# Altium PCB BOARD.PcbDoc
Units mm, origin at the board's own origin, x right, y up, seen from the top; angles counter-clockwise.
Board outline 18 x 32.5 mm, 2 copper layers (Top Layer, Bottom Layer), stack 0.46 mm thick; 78 components, 43 nets, 200 pads, 0 vias.
Unrouted connection lines stored in the file: 152.
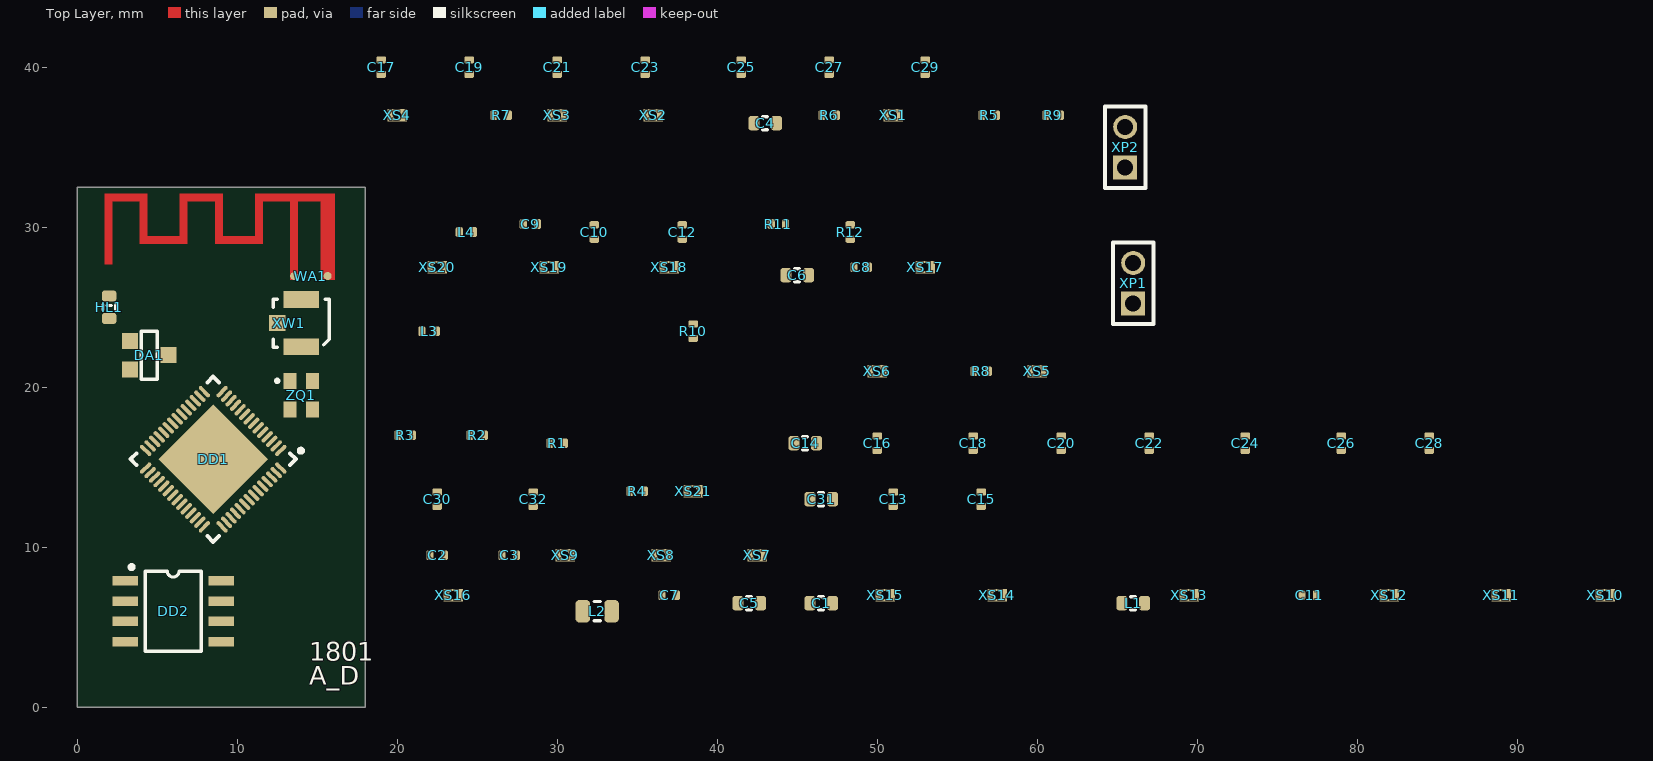
[diagram p0: Top Layer view]
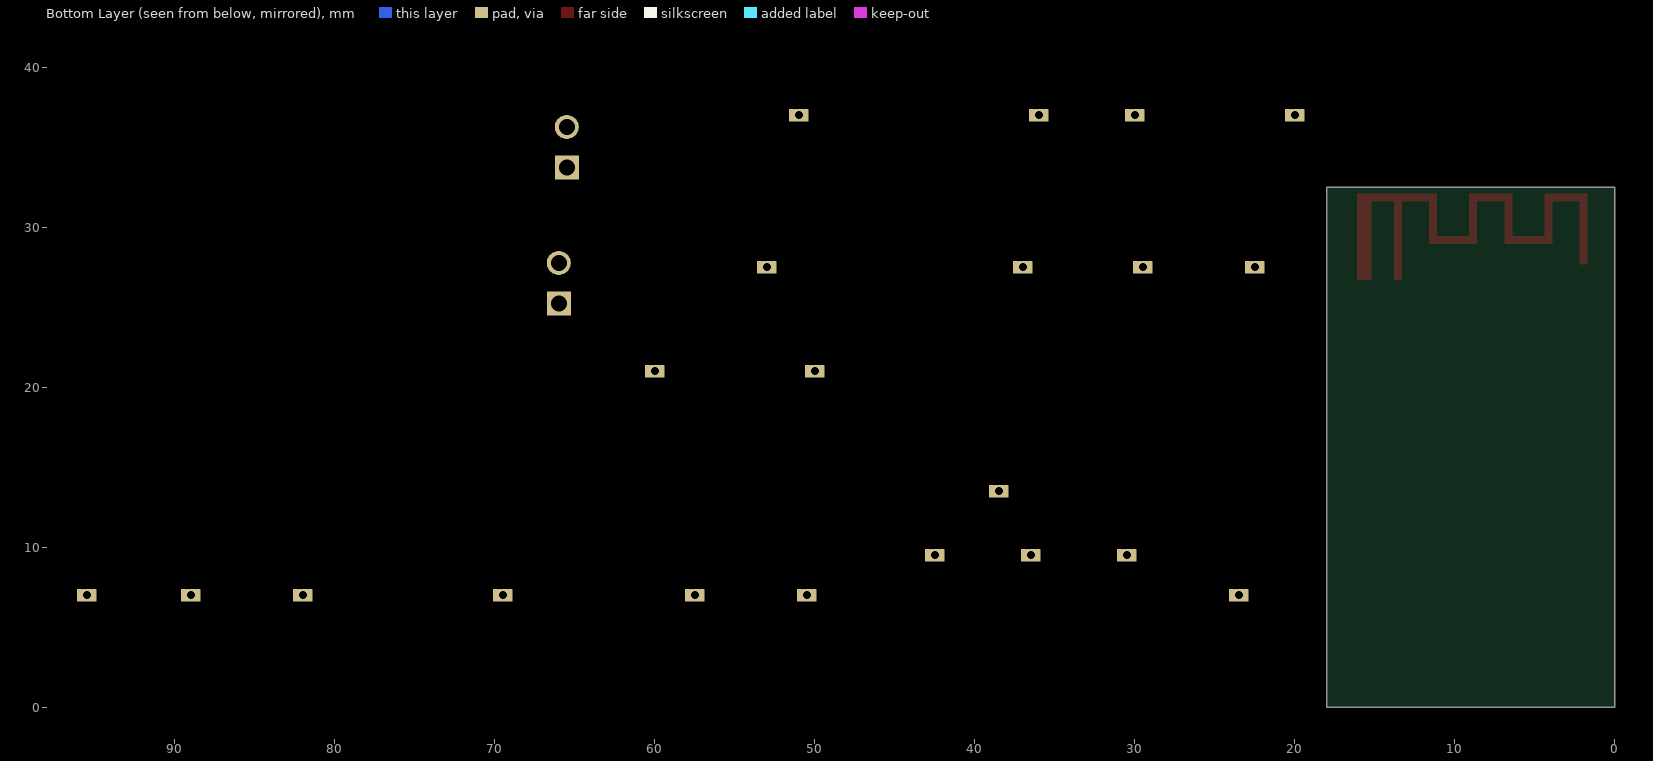
[diagram p1: Bottom Layer view, seen from below]

## Layer stack, top to bottom
Top Solder: solder mask 0.01, Solder Resist, Dk 3.5
Top Layer: signal copper 0.03
Dielectric1: core 0.4, FR-4, Dk 4.2
Bottom Layer: signal copper 0.03
Bottom Solder: solder mask 0.01, Solder Resist, Dk 3.5

## Board outline
0,0 18,0 18,32.5 0,32.5

## Design rules (kind name [scope] priority, off if disabled: settings)
Clearance Clearance_ANT [InNetClass('ANT_Class') vs InPolygon] p1: gap=0.6 ignorepadtopadclearanceinfootprint=FALSE except(0: Arc-Hole Track-Hole SMDPad-Hole THPad-Hole Via-Hole Fill-Hole Poly-Hole Region-Hole Text-Hole)
Clearance Clearance_GND_Poly [(InNet('GND') AND InPolygon )] p2: gap=0.2 ignorepadtopadclearanceinfootprint=FALSE except(0: Arc-Hole Track-Hole SMDPad-Hole THPad-Hole Via-Hole Fill-Hole Poly-Hole Region-Hole Text-Hole)
Clearance [All] p3: gap=0.15 ignorepadtopadclearanceinfootprint=FALSE except(0: Arc-Hole Track-Hole SMDPad-Hole THPad-Hole Via-Hole Fill-Hole Poly-Hole Region-Hole Text-Hole)
ComponentClearance [All] p1 off: gap=0.25 collisioncheckmode=3 verticalgap=0.25 showdistances=FALSE
DiffPairsRouting [All] p1: maxlimit=0.4 minlimit=0.15 mostfreqgap=0.25 toplayer_minwidth=0.2 toplayer_maxwidth=0.4 toplayer_prefwidth=0.25 bottomlayer_minwidth=0.2 bottomlayer_maxwidth=0.4 bottomlayer_prefwidth=0.25 maxuncoupledlength=12
Height [All] p1: minheight=0 maxheight=25 prefheight=25
HoleSize [All] p1: absolutevalues=TRUE maxlimit=6 minlimit=0.3 maxpercent=80.000 minpercent=20.000
HoleToHoleClearance [All] p1: gap=0.25 allowstackedmicrovias=TRUE
MinimumSolderMaskSliver [All] p1 off: minsoldermaskwidth=0.254
PlaneClearance [All] p1: clearance=0.5
PlaneConnect [All] p1: planeconnectstyle=Relief reliefexpansion=0.5 reliefentries=4 reliefconductorwidth=0.25 reliefairgap=0.25
PolygonConnect PolygonConnect_XW1 [InComponent('XW1') vs IsPolygon] p1: connectstyle=Direct reliefconductorwidth=0.254 reliefentries=4 polygonreliefangle="90 Angle" airgapwidth=0.254
PolygonConnect PolygonConnect_Components [InComponent('C*') OR InComponent('R*') OR InComponent('NR*') OR InComponent('DA*') OR InComponent('DD*') OR InComponent('HL*')] p2: connectstyle=Relief reliefconductorwidth=0.2 reliefentries=4 polygonreliefangle="90 Angle" airgapwidth=0.25
PolygonConnect PolygonConnect_Connectors [All vs (InPadClass('All Pads'))] p3: connectstyle=Relief reliefconductorwidth=0.6 reliefentries=4 polygonreliefangle="90 Angle" airgapwidth=0.3
PolygonConnect PolygonConnect_Via [All] p4: connectstyle=Direct reliefconductorwidth=0.254 reliefentries=4 polygonreliefangle="90 Angle" airgapwidth=0.254
RoutingCorners [All] p1: cornerstyle=45-Degree minsetback=1.5 maxsetback=3.5
RoutingVias [All] p1: holewidth=0.6 width=1.2 viastyle="Through Hole" minholewidth=0.3 minwidth=0.6 maxholewidth=1 maxwidth=2
SMDEntry [All] p1: side=TRUE corner=TRUE anyangle=TRUE
SilkToSilkClearance [All] p1 off: silktosilkclearance=0.254
SilkToSolderMaskClearance [IsPad] p1 off: minsilkscreentomaskgap=0.254 clearancetoexposedcopper=TRUE
SolderMaskExpansion [All] p1: expansion=0.1
Width [All] p1: maxlimit=8 minlimit=0.2 preferedwidth=0.6
Width Width_TrackEnds [All] p2 off: maxlimit=0.25 minlimit=0.25 preferedwidth=0.25 checkconnectedcopper=TRUE
19 further rules are at their usual default settings.

## Components (designator, comment, footprint, x,y, rotation, side; value= is the part's Value field where it differs from the comment)
C1 "Capacitor" C0603_L 46.499,6.499 r0 top value=10uF
C2 "Capacitor" C0402_L 22.499,9.499 r0 top value=12pF
C3 "Capacitor" C0402_L 26.999,9.499 r0 top value=12pF
C4 "Capacitor" C0603_L 42.999,36.499 r0 top value=10uF
C5 "Capacitor" C0603_L 41.999,6.499 r0 top value=10uF
C6 "Capacitor" C0603_L 45,27 r0 top value=10uF
C7 "Capacitor" C0402_L 36.999,6.999 r0 top value=0.1uF
C8 "Capacitor" C0402_L 49,27.5 r0 top value=0.1uF
C9 "Capacitor" C0402_L 28.325,30.2 r0 top value=2.7pF
C10 "Capacitor" C0402_L 32.325,29.7 r90 top value=2.7pF
C11 "Capacitor" C0402_L 76.999,6.999 r0 top value=0.1uF
C12 "Capacitor" C0402_L 37.825,29.7 r90 top value=2.7pF
C13 "Capacitor" C0402_L 50.999,12.999 r90 top value=0.1uF
C14 "Capacitor" C0603_L 45.499,16.499 r0 top value=10uF
C15 "Capacitor" C0402_L 56.499,12.999 r90 top value=0.1uF
C16 "Capacitor" C0402_L 49.999,16.499 r90 top value=0.1uF
C17 "Capacitor" C0402_L 18.999,39.999 r90 top value=1uF
C18 "Capacitor" C0402_L 55.999,16.499 r90 top value=0.1uF
C19 "Capacitor" C0402_L 24.499,39.999 r90 top value=0.1uF
C20 "Capacitor" C0402_L 61.499,16.499 r90 top value=1uF
C21 "Capacitor" C0402_L 29.999,39.999 r90 top value=0.1uF
C22 "Capacitor" C0402_L 66.999,16.499 r90 top value=0.1uF
C23 "Capacitor" C0402_L 35.499,39.999 r90 top value=0.1uF
C24 "Capacitor" C0402_L 72.999,16.499 r90 top value=0.1uF
C25 "Capacitor" C0402_L 41.499,39.999 r90 top value=0.1uF
C26 "Capacitor" C0402_L 78.999,16.499 r90 top value=0.1uF
C27 "Capacitor" C0402_L 46.999,39.999 r90 top value=0.1uF
C28 "Capacitor" C0402_L 84.499,16.499 r90 top value=0.1uF
C29 "Capacitor" C0402_L 52.999,39.999 r90 top value=0.1uF
C30 "Capacitor" C0402_L 22.499,12.999 r90 top value=0.1uF
C31 "Capacitor" C0603_L 46.499,12.999 r0 top value=10uF
C32 "Capacitor" C0402_L 28.499,12.999 r90 top value=0.1uF
DA1 "MAX809-Series" SOT-23 4.5,22 r270 top value=MAX809SEUR
DD1 "RTL8711AM" QFN-56-7x7 8.5,15.5 r225 top
DD2 "MX25L1606E-8Pin-Series" SOIC-8 6,6 r270 top value=MX25L1606EM1I-12
HL1 "Text" LD0603_L 2,25 r90 top value=BL-LS0603GC
L1 "FerriteBead" L0603_L 65.999,6.499 r0 top value=BLM18PG121SN1
L2 "FerriteBead" L0805_L 32.499,5.999 r0 top value=BLM21PG331SN1
L3 "Coil" L0402_L 21.998,23.499 r0 top value=LQG15HS2N2S02D
L4 "Coil" L0402_L 24.325,29.7 r0 top value=LQG15HS2N2S02D
R1 "Resistor" R0402_L 29.999,16.499 r0 top value=470
R2 "Resistor" R0402_L 24.999,16.999 r0 top value=100k
R3 "Resistor" R0402_L 20.499,16.999 r0 top value=10k
R4 "Resistor" R0402_L 34.999,13.499 r0 top value=100k
R5 "Resistor" R0402_L 56.999,36.999 r0 top value=10k
R6 "Resistor" R0402_L 46.999,36.999 r0 top value=51k
R7 "Resistor" R0402_L 26.499,36.999 r0 top value=51k
R8 "Resistor" R0402_L 56.499,20.999 r0 top value=51k
R9 "Resistor" R0402_L 60.999,36.999 r0 top value=0
R10 "Resistor" R0402_L 38.498,23.499 r90 top value=0
R11 "Resistor" R0402_L 43.825,30.2 r0 top value=0
R12 "Resistor" R0402_L 48.325,29.7 r90 top value=0
WA1 "Antenna_PCB_2p" PCB-AN043 9,29.5 r180 top net-tie value=PCB-AN043
XP1 "SWD" PLS-2 66,26.5 r90 top value=PLS-2
XP2 "LOG" PLS-2 65.499,34.999 r90 top value=PLS-2
XS1 "PCB-SPIN" PCB-SPIN 50.999,36.999 r90 top
XS2 "PCB-SPIN" PCB-SPIN 35.999,36.999 r90 top
XS3 "PCB-SPIN" PCB-SPIN 29.999,36.999 r90 top
XS4 "PCB-SPIN" PCB-SPIN 19.999,36.999 r90 top
XS5 "PCB-SPIN" PCB-SPIN 59.999,20.999 r90 top
XS6 "PCB-SPIN" PCB-SPIN 49.999,20.999 r90 top
XS7 "PCB-SPIN" PCB-SPIN 42.499,9.499 r90 top
XS8 "PCB-SPIN" PCB-SPIN 36.499,9.499 r90 top
XS9 "PCB-SPIN" PCB-SPIN 30.499,9.499 r90 top
XS10 "PCB-SPIN" PCB-SPIN 95.499,6.999 r90 top
XS11 "PCB-SPIN" PCB-SPIN 88.999,6.999 r90 top
XS12 "PCB-SPIN" PCB-SPIN 81.999,6.999 r90 top
XS13 "PCB-SPIN" PCB-SPIN 69.499,6.999 r90 top
XS14 "PCB-SPIN" PCB-SPIN 57.499,6.999 r90 top
XS15 "PCB-SPIN" PCB-SPIN 50.499,6.999 r90 top
XS16 "PCB-SPIN" PCB-SPIN 23.499,6.999 r90 top
XS17 "PCB-SPIN" PCB-SPIN 53,27.5 r90 top
XS18 "PCB-SPIN" PCB-SPIN 37,27.5 r90 top
XS19 "PCB-SPIN" PCB-SPIN 29.5,27.5 r90 top
XS20 "PCB-SPIN" PCB-SPIN 22.5,27.5 r90 top
XS21 "PCB-SPIN" PCB-SPIN 38.499,13.499 r90 top
XW1 "Con-RF-M" 1909763-1 14,24 r270 top value=1909763-1
ZQ1 "Crystal" SX-2520 14,19.5 r270 top value=CX2520DB40000D0FLJCC

## Footprints (in the part's own frame and the unit in brackets; to place one, negate y for a bottom-side part, rotate by r counter-clockwise, add the part's x,y. Pads: shape width x height; smd on the part's side, far side on the other; paste and mask are expansions set on the pad)
1909763-1 [mm] "IPX"
  rect 1x1.05 smd: 1(0,-1.5)
  rect 1.05x2.2 smd: 2(-1.475,0) 2(1.475,0)
  silkscreen extent -1.5,-1.75 1.5,1.75, body extent -1.5,-1.55 1.5,1.55, height 1.2
C0402_L [mm] "Chip Capacitor; Body 1.0 x 0.5 mm (LxW typ)"
  rrect50% 0.45x0.6 smd: 1(-0.452,0) 2(0.452,0)
  body extent -0.5,-0.25 0.5,0.25, height 0.61
C0603_L [mm] "Chip Capacitor; Body 1.6 x 0.8 mm (LxW typ)"
  rrect50% 0.7x0.9 smd: 1(-0.7,0) 2(0.7,0)
  silkscreen extent -0.15,-0.41 0.15,0.41, body extent -0.79,-0.41 0.81,0.39, height 0.8
L0402_L [mm] "Chip Coil; Body 1.0 x 0.5 mm (LxW typ)"
  rrect50% 0.45x0.6 smd mask+0.05: 1(-0.452,0) 2(0.452,0)
  Top Layer pour cut-out: -0.325,0.3 0.325,0.3 0.325,-0.3 -0.325,-0.3
  body extent -0.5,-0.3 0.5,0.3, height 0.5
L0603_L [mm] "Chip Coil; Body 1.6 x 0.8 mm (LxW typ)"
  rrect50% 0.7x0.9 smd: 1(-0.7,0) 2(0.7,0)
  silkscreen extent -0.15,-0.41 0.15,0.41, body extent -0.8,-0.47 0.8,0.48, height 0.8
L0805_L [mm] "Chip Coil; Body 2.0 x 1.2 mm (LxW typ)"
  rrect50% 0.9x1.4 smd: 1(-0.9,0) 2(0.9,0)
  silkscreen extent -0.2,-0.6 0.2,0.6, body extent -0.97,-0.65 1.03,0.65, height 1.2
LD0603_L [mm] "Chip Led; Body 1.6 x 0.8 mm (LxW typ)"
  rrect50% 0.7x0.9 smd mask+0.05: 1(-0.7,0) 2(0.7,0)
  silkscreen extent -0.15,-0.41 0.15,0.41, body extent -0.8,-0.4 0.8,0.4, height 0.7
PCB-AN043 [mm]
  round 0.5 smd: 1(-4.55,2.55) 2(-6.65,2.55)
  Top Layer region: -7.1,-2.1 -6.2,-2.1 -6.2,2.8 -7.1,2.8
  Top Layer region: -7.1,-2.6 -2.1,-2.6 -2.1,-2.1 -7.1,-2.1
  Top Layer region: -4.8,2.8 -4.8,-2.1 -4.3,-2.1 -4.3,2.8
  Top Layer region: -2.6,0.54 -2.6,-2.1 -2.1,-2.1 -2.1,0.54
  Top Layer region: -0.1,0.54 -2.1,0.54 -2.1,0.04 -0.1,0.04
  Top Layer region: -0.1,0.54 -0.1,-2.1 0.4,-2.1 0.4,0.54
  Top Layer region: 2.6,-2.1 -0.1,-2.1 -0.1,-2.6 2.6,-2.6
  Top Layer region: 2.1,0.54 2.1,-2.1 2.6,-2.1 2.6,0.54
  Top Layer region: 4.6,0.54 2.6,0.54 2.6,0.04 4.6,0.04
  Top Layer region: 4.6,0.54 4.6,-2.1 5.1,-2.1 5.1,0.54
  Top Layer region: 7.3,-2.1 4.6,-2.1 4.6,-2.6 7.3,-2.6
  Top Layer region: 6.8,1.84 6.8,-2.1 7.3,-2.1 7.3,1.84
  Multi-Layer pour cut-out: -7.6,2.3 -7.6,-2.9 7.6,-2.9 7.6,2.3
PCB-SPIN [mm]
  rect 0.8x1.2 hole 0.5: 1(0,0)
PLS-2 [mm]
  rect 1.5x1.5 hole 1: 1(-1.27,0)
  round 1.5 hole 1: 2(1.27,0)
  silkscreen extent -2.54,-1.27 2.54,1.27, body extent -2.54,-1.27 2.54,1.27, height 8.9
QFN-56-7x7 [mm] "QFN, 56-Leads, Body 7,00x7,00mm, Pitch 0,40mm, Thermal Pad 4,85x4,85mm, IPC Medium Density"
  oval 0.9x0.25 smd: 1(-3.375,2.6) 2(-3.375,2.2) 3(-3.375,1.8) 4(-3.375,1.4) 5(-3.375,1) 6(-3.375,0.6) 7(-3.375,0.2) 8(-3.375,-0.2) 9(-3.375,-0.6) 10(-3.375,-1) 11(-3.375,-1.4) 12(-3.375,-1.8) 13(-3.375,-2.2) 14(-3.375,-2.6) 29(3.375,-2.6) 30(3.375,-2.2) 31(3.375,-1.8) 32(3.375,-1.4) 33(3.375,-1) 34(3.375,-0.6) 35(3.375,-0.2) 36(3.375,0.2) 37(3.375,0.6) 38(3.375,1) 39(3.375,1.4) 40(3.375,1.8) 41(3.375,2.2) 42(3.375,2.6)
  oval 0.25x0.9 smd: 15(-2.6,-3.375) 16(-2.2,-3.375) 17(-1.8,-3.375) 18(-1.4,-3.375) 19(-1,-3.375) 20(-0.6,-3.375) 21(-0.2,-3.375) 22(0.2,-3.375) 23(0.6,-3.375) 24(1,-3.375) 25(1.4,-3.375) 26(1.8,-3.375) 27(2.2,-3.375) 28(2.6,-3.375) 43(2.6,3.375) 44(2.2,3.375) 45(1.8,3.375) 46(1.4,3.375) 47(1,3.375) 48(0.6,3.375) 49(0.2,3.375) 50(-0.2,3.375) 51(-0.6,3.375) 52(-1,3.375) 53(-1.4,3.375) 54(-1.8,3.375) 55(-2.2,3.375) 56(-2.6,3.375)
  rect 4.85x4.85 smd: 57(0,0)
  silkscreen extent -4.37,-3.65 3.65,3.65, body extent -3.55,-3.55 3.55,3.55, height 0.9
R0402_L [mm] "Chip Resistor; Body 1.0 x 0.5 mm (LxW typ)"
  rrect50% 0.45x0.6 smd: 1(-0.452,0) 2(0.452,0)
  body extent -0.5,-0.25 0.5,0.25, height 0.4
SOIC-8 [mm] "4320.8-А Small Outline; 8 Leads; Body Width 3.9 mm; Pitch 1.27 mm"
  rect 0.6x1.6 smd: 1(-1.905,-3) 2(-0.635,-3) 3(0.635,-3) 4(1.905,-3) 5(1.905,3) 6(0.635,3) 7(-0.635,3) 8(-1.905,3)
  silkscreen extent -2.88,-2.72 2.5,1.75, body extent -2.5,-3.01 2.5,3.01, height 1.75
SOT-23 [mm] "КТ-46"
  rect 1x1 smd: 1(-0.9,-1.2) 2(0,1.2) 3(0.9,-1.2)
  silkscreen extent -1.5,-0.5 1.5,0.5, body extent -1.5,-1.15 1.5,1.15, height 1.11
SX-2520 [mm]
  rect 1x0.8 smd: 1(-0.9,-0.7) 2(0.9,-0.7) 3(0.9,0.7) 4(-0.9,0.7)
  silkscreen extent -1,-1.6 -0.8,-1.4, body extent -1.25,-1 1.25,1, height 0.55

## Part data
C1 C4 C5 C6 C14 C31: library part GRM188R60J106ME47D, Dielectric Type=X5R, Manufacturer=Murata, Tolerance=±20%, Voltage=6.3V, Working Temperature Max=+85°С, Working Temperature Min=-55°С, Application Category=1, ID=136, Part Number=GRM188R60J106ME47D, Published=18.05.2010, Publisher="Andrew Danich", Type=Конденсатор
C2 C3: library part GRM1555C1H120JA01D, Dielectric Type=NP0, Manufacturer=Murata, Tolerance=±5%, Voltage=50V, ID=159, Part Number=GRM1555C1H120JA01D, Published=18.05.2010, Publisher="Andrew Danich", Type=Конденсатор
C7 C8 C11 C13 C15 C16 C18 C19 C21 C22 C23 C24 C25 C26 C27 C28 C29 C30 C32: library part GRM155R71A104KA01D, Dielectric Type=X7R, Manufacturer=Murata, Tolerance=±10%, Voltage=10V, ID=151, Part Number=GRM155R71A104KA01D, Published=18.05.2010, Publisher="Andrew Danich", Type=Конденсатор
C9 C10 C12: library part GRM1555C1E2R7BA01D, Dielectric Type=NP0, Manufacturer=Murata, Tolerance=±0.1pF, Voltage=50V, Working Temperature Max=+125°С, Working Temperature Min=-55°С, Application Category=1, ID=198, Part Number=GRM1555C1E2R7BA01D, Published=18.05.2010, Publisher="Andrew Danich", Type=Конденсатор
C17 C20: library part GRM155R61A105KE15D, Dielectric Type=X5R, Manufacturer=Murata, Tolerance=±10%, Voltage=10V, Working Temperature Max=+125°С, Working Temperature Min=-55°С, Application Category=1, ID=179, Part Number=GRM155R61A105KE15D, Published=18.05.2010, Publisher="Andrew Danich", Type=Конденсатор
DA1: library part MAX809SEUR, Manufacturer="Maxim Integrated", Supply Current=17uA, Supply Voltage=+1.2…5.5V, Temperature Coefficient=30ppm, Working Temperature Max=+105°С, Working Temperature Min=-40°С, Application Category=1, ID=2, Manual Reset Input=1, Output Type=Push-Pull, Part Number=MAX809SEUR, Published=24.01.2018, Publisher="Andrew Danich", Reset Delay=20uS, Reset Threshold=+2.93V, Type=Микросхема
DD1: Manufacturer=Realtek, Operation Frequency=166MHz, Supply Current=150mA, Working Temperature Max=+85°С, Working Temperature Min=-20°С, Application Category=1, Flash=External, Functional Analog=-, I/O Lines=19, ID=6, Part Number=RTL8711AM, Published=01.08.2017, Publisher="Andrew Danich", Supply Operation=+3.0…3.6V, Supported Interfaces="SDIO, I2C, I2S, PCM, SPI, UART, ADC, NFC", Type=Микросхема, Wireless Compatibility="WiFi 802.11 b/g/n, 802.11e"
DD2: library part MX25L1606EM1I-12, Clock Frequency=86MHz, Manufacturer=MXIC, Supply Current=25mA, Working Temperature Max=+85°С, Working Temperature Min=-40°С, Addressable=NO, Application Category=1, ID=11, Interface="SPI, Dual SPI", Memory=16Mbit/2Mbyte, Part Number=MX25L1606EM1I-12, Published=11.06.2017, Publisher="Andrew Danich", Supply Operation=+2.7…3.6V, Type=Микросхема
HL1: library part BL-LS0603GC, Color=Green, Forward Current=30mA, Forward Voltage=2.3V, Power Dissipation=65mW, ID=14, Leds=1, Part Number=BL-LS0603GC, Published=03.12.2013, Publisher="Andrew Danich", Type="Индикатор единичный"
L1: library part BLM18PG121SN1, DC Resistance=0.05ohm, Inductor Type=EMIFIL, Manufacturer=Murata, Rated Current=2A, Working Temperature Max=+125°С, Working Temperature Min=-55°С, Application Category=1, ID=4, Impedance at 100Mhz=120ohm, Part Number=BLM18PG121SN1, Published=14.11.2014, Publisher="Andrew Danich", Type=Дроссель
L2: library part BLM21PG331SN1, DC Resistance=0.07ohm, Inductor Type=EMIFIL, Manufacturer=Murata, Rated Current=1.5A, Working Temperature Max=+125°С, Working Temperature Min=-55°С, Application Category=1, ID=2, Impedance at 100Mhz=330ohm, Part Number=BLM21PG331SN1, Published=14.11.2014, Publisher="Andrew Danich", Type=Дроссель
L3 L4: library part LQG15HS2N2S02D, Inductance=2.2nH, Manufacturer=Murata, Rated Current=300mA, Tolerance=±0.3nH, Application Category=1, ID=84, Part Number=LQG15HS2N2S02D, Published=20.05.2010, Publisher="Andrew Danich", Type=Дроссель
R1: library part RC0402JR-07430RL, Limit Voltage=50V, Manufacturer=Yageo, Temperature Coefficient=100ppm, Tolerance=±5%, Total Power Dissipation=0.1W, Working Temperature Max=+155°С, Working Temperature Min=-55°С, Application Category=1, ID=376, Part Number=RC0402JR-07430RL, Published=24.03.2010, Publisher="Andrew Danich", Series Type=Thick-Film, Type=Резистор
R2 R4: library part RC0402JR-07100KL, Limit Voltage=50V, Manufacturer=Yageo, Temperature Coefficient=100ppm, Tolerance=±5%, Total Power Dissipation=0.1W, Working Temperature Max=+155°С, Working Temperature Min=-55°С, Application Category=1, ID=351, Part Number=RC0402JR-07100KL, Published=24.03.2010, Publisher="Andrew Danich", Series Type=Thick-Film, Type=Резистор
R3 R5: library part RC0402FR-0710KL, Limit Voltage=50V, Manufacturer=Yageo, Temperature Coefficient=100ppm, Tolerance=±1%, Total Power Dissipation=0.1W, Working Temperature Max=+155°С, Working Temperature Min=-55°С, Application Category=1, ID=2, Part Number=RC0402FR-0710KL, Published=24.03.2010, Publisher="Andrew Danich", Series Type=Thick-Film, Type=Резистор
R6 R7 R8: library part RC0402JR-0751KL, Limit Voltage=50V, Manufacturer=Yageo, Temperature Coefficient=100ppm, Tolerance=±5%, Total Power Dissipation=0.1W, Working Temperature Max=+155°С, Working Temperature Min=-55°С, Application Category=1, ID=388, Part Number=RC0402JR-0751KL, Published=24.03.2010, Publisher="Andrew Danich", Series Type=Thick-Film, Type=Резистор
R9 R10 R11 R12: library part RC0402JR-070RL, Limit Voltage=50V, Manufacturer=Yageo, Temperature Coefficient=100ppm, Tolerance=±1%, Total Power Dissipation=0.1W, Working Temperature Max=+155°С, Working Temperature Min=-55°С, Application Category=1, ID=362, Part Number=RC0402JR-070RL, Published=24.03.2010, Publisher="Andrew Danich", Series Type=Thick-Film, Type=Резистор
WA1: library part PCB-AN043, Center Frequency=2.45GHz, Manufacturer="Texas Instruments", Application Category=1, Functional Analog=-, ID=2, Input Impedance=50ohm, Part Number=PCB-AN043, Published=08.01.2017, Publisher="Andrew Danich", Type=Антенна
XP1 XP2: library part PLS-2, Limit Current=3A, Limit Voltage=250V, Resistance=15momh, Connector Type=Male, ID=1, Part Number=PLS-2, Pins=2, Pitch=2.54mm, Published=07.03.2013, Publisher="Andrew Danich", Surface Finish=Gold, Type=Вилка
XW1: library part 1909763-1, Frequency Band=6GHz, Limit Current=-, Manufacturer="TE Connectivity", Wave Resistance=50ohm, Working Temperature Max=+90°С, Working Temperature Min=-40°С, Application Category=1, Connector Type=Male, ID=3, Limit Voltage=-, Part Number=1909763-1, Pins=3, Published=19.09.2015, Publisher="НТЦ \"Вектор\"", Surface Finish=Gold, Type=Вилка
ZQ1: library part CX2520DB40000D0FLJCC, Load Capacitance=8pF, Manufacturer="AVX / Kyocera", Output Frequency=40MHz, Temperature Coefficient=±15ppm, Working Temperature Max=+85°С, Working Temperature Min=-30°С, Application Category=1, Drive Level=10uW, ID=24, Part Number=CX2520DB40000D0FLJCC, Published=08.03.2013, Publisher="Andrew Danich", Type=Резонатор

## Nets (pads, with @x,y where several pads share a name; then routed paths per layer and width w, separated by ;. In a path a pad name is that pad's centre, name@x,y a point inside that pad or via, vN(x,y) a via of type N, cw(c..) or ccw(c..) an arc to the next point about the centre after c; other vN are vias at no path point)
GND: C1.1 C2.1 C3.1 C4.1 C5.1 C6.1 C7.1 C8.1 C9.1 C11.1 C12.1 C13.1 C14.1 C15.1 C16.1 C17.1 C18.1 C19.1 C20.1 C21.1 C22.1 C23.1 C24.1 C25.1 C26.1 C27.1 C28.1 C29.1 C30.1 C31.1 C32.1 DA1.1 DD1.44 DD1.57 DD2.4 L4.2 R3.1 R5.2 R9.1 WA1.2 XS3.1 XS4.1 XS15.1 XS16.1 XW1.2
NetC1_2: C1.2 L1.1 XS14.1
NetC2_2: C2.2 DD1.11 ZQ1.1
NetC3_2: C3.2 DD1.10 ZQ1.3
NetC4_2: C4.2 DD1.26
NetC10_1: C10.1 R9.2
NetC10_2: C10.2 L3.2 L4.1 R10.2 R11.2
NetC12_2: C12.2 R11.1 R12.2
NetDD1_43: DD1.43 L2.1
NetHL1_1: HL1.1 R1.2
NetR10_1: R10.1 XW1.1
NetR12_1: R12.1 WA1.1
nRST: DA1.3 DD1.29 R4.2 XS9.1
PA3: DD1.36 XS5.1
PA5: DD1.37 XS6.1
PA6: DD1.39 XS8.1
PA7: DD1.38 XS7.1
PB0: DD1.1 XP2.2 XS19.1
PB1: DD1.2 R3.2 XP2.1 XS20.1
PB2: DD1.3 HL1.2 R2.2
PB3: DD1.4 XS21.1
PC0: DD1.53 XS10.1
PC1: DD1.52 XS13.1
PC2: DD1.51 XS12.1
PC3: DD1.50 XS11.1
PC4: DD1.55 XS17.1
PC5: DD1.56 XS18.1
PE0: DD1.23
PE1: DD1.22
PE2: DD1.21
PE3: DD1.20 XP1.2 XS2.1
PE4: DD1.19 XP1.1 XS1.1
PF5: DD1.33 R5.1
RFIO: C9.2 DD1.15 L3.1
SPIM_CLK: DD1.30 DD2.6
SPIM_DT0: DD1.31 DD2.5
SPIM_DT1: DD1.34 DD2.2
SPIM_nCS: DD1.32 DD2.1 R8.2
SPIM_nHOLD: DD2.7 R7.2
SPIM_nWP: DD2.3 R6.2
VCC1P2: C6.2 C8.2 C13.2 C15.2 C17.2 C19.2 C21.2 C23.2 C25.2 C27.2 C29.2 DD1.9 DD1.13 DD1.17 DD1.24 DD1.25 DD1.40 DD1.47 DD1.49 L2.2
VCC3P3: C5.2 C7.2 C11.2 C14.2 C16.2 C18.2 C20.2 C22.2 C24.2 C26.2 C28.2 C30.2 C32.2 DA1.2 DD1.5 DD1.6 DD1.12 DD1.14 DD1.16 DD1.18 DD1.28 DD1.35 DD1.42 DD1.46 DD1.54 DD2.8 L1.2 R1.1 R2.1 R4.1 R6.1 R7.1 R8.1
VCC_SDRAM: C31.2 DD1.41 DD1.45 DD1.48
pads on no net: DD1.7 DD1.8 DD1.27 ZQ1.2 ZQ1.4

## Silkscreen, mask and mechanical layers (free items; w line width, h text height)
Top Overlay:
  text "1801" at 14.5,2.5 h2
  text "A_D" at 14.5,1 h2
1 - Board Outline:
  the board outline again, w0.1
11 - Dementions (Top):
  lines w0.254: -2.508,1.524 -2,0 ; -2.508,31.476 -2,33 ; -2.254,0 -1.746,0 ; -2.254,33 -1.746,33 ; -2,11.396 -2,0 ; -2,21.604 -2,33 ; -1.492,1.524 -2,0 ; -1.492,31.476 -2,33 ; 0,-2.254 0,-1.746 ; 1.524,-2.508 0,-2 ; 1.524,-1.492 0,-2 ; 4.023,-2 0,-2 ; 13.977,-2 18,-2 ; 16.476,-2.508 18,-2 ; 16.476,-1.492 18,-2 ; 18,-2.254 18,-1.746
  text "33 (mm)" at -1.086,11.65 h1.52 r90
  text "18 (mm)" at 4.277,-2.914 h1.52